# EAGLE board arduino_uno_pcb _with_lcd (EAGLE 6.1)
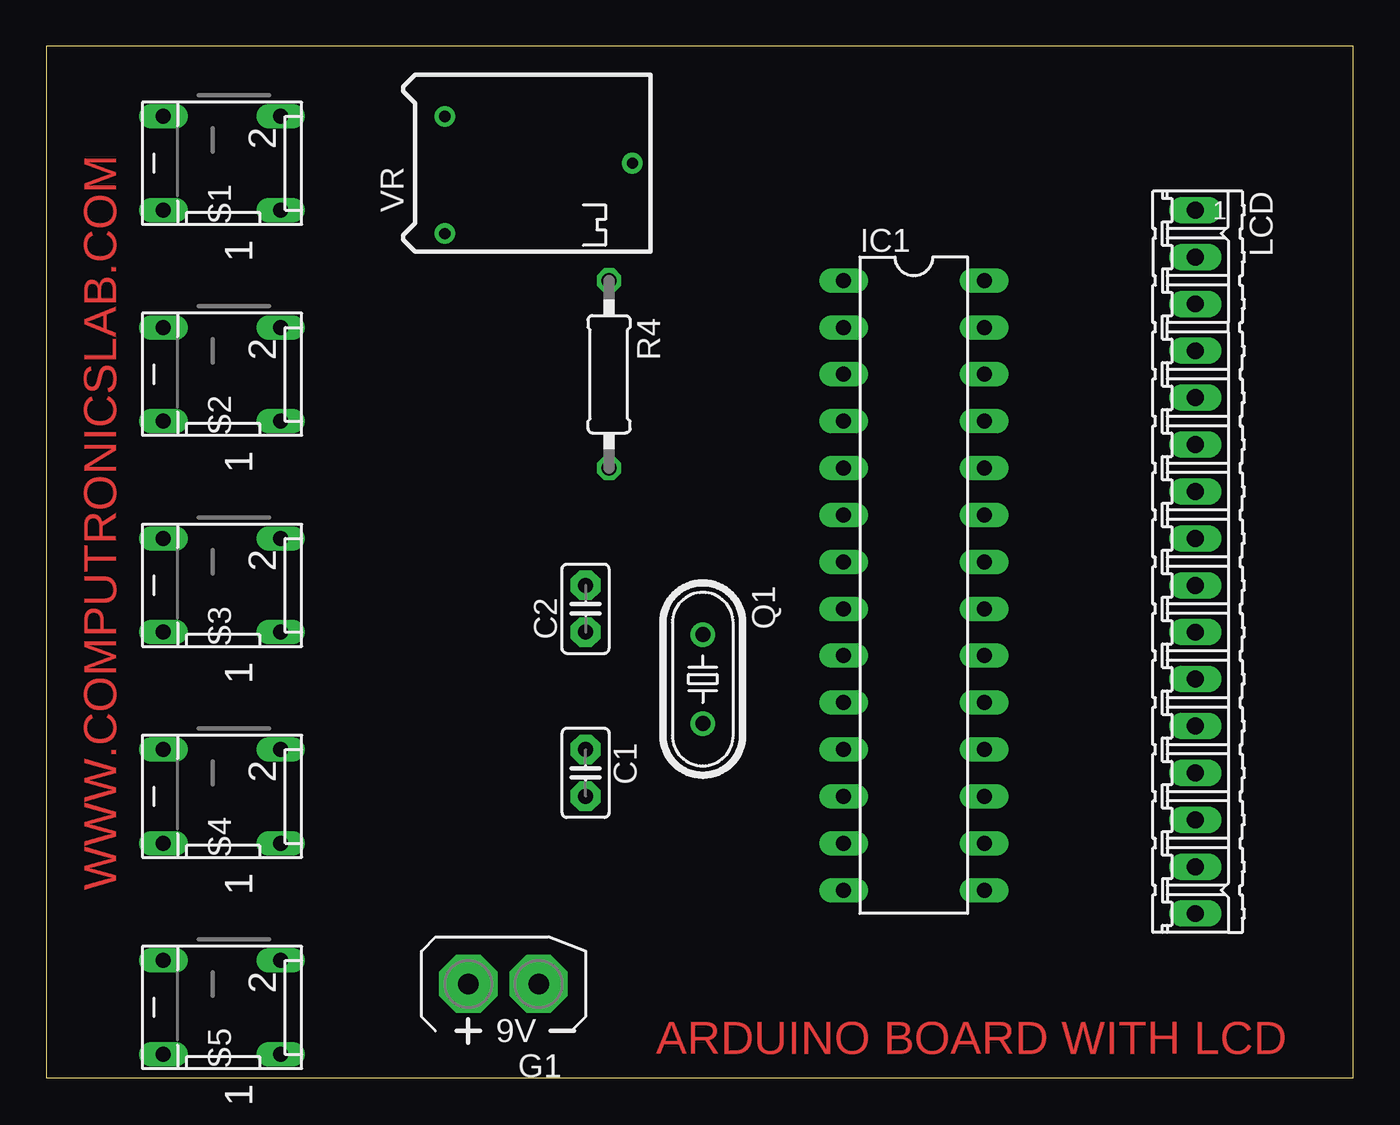
[diagram p0: board, top side]
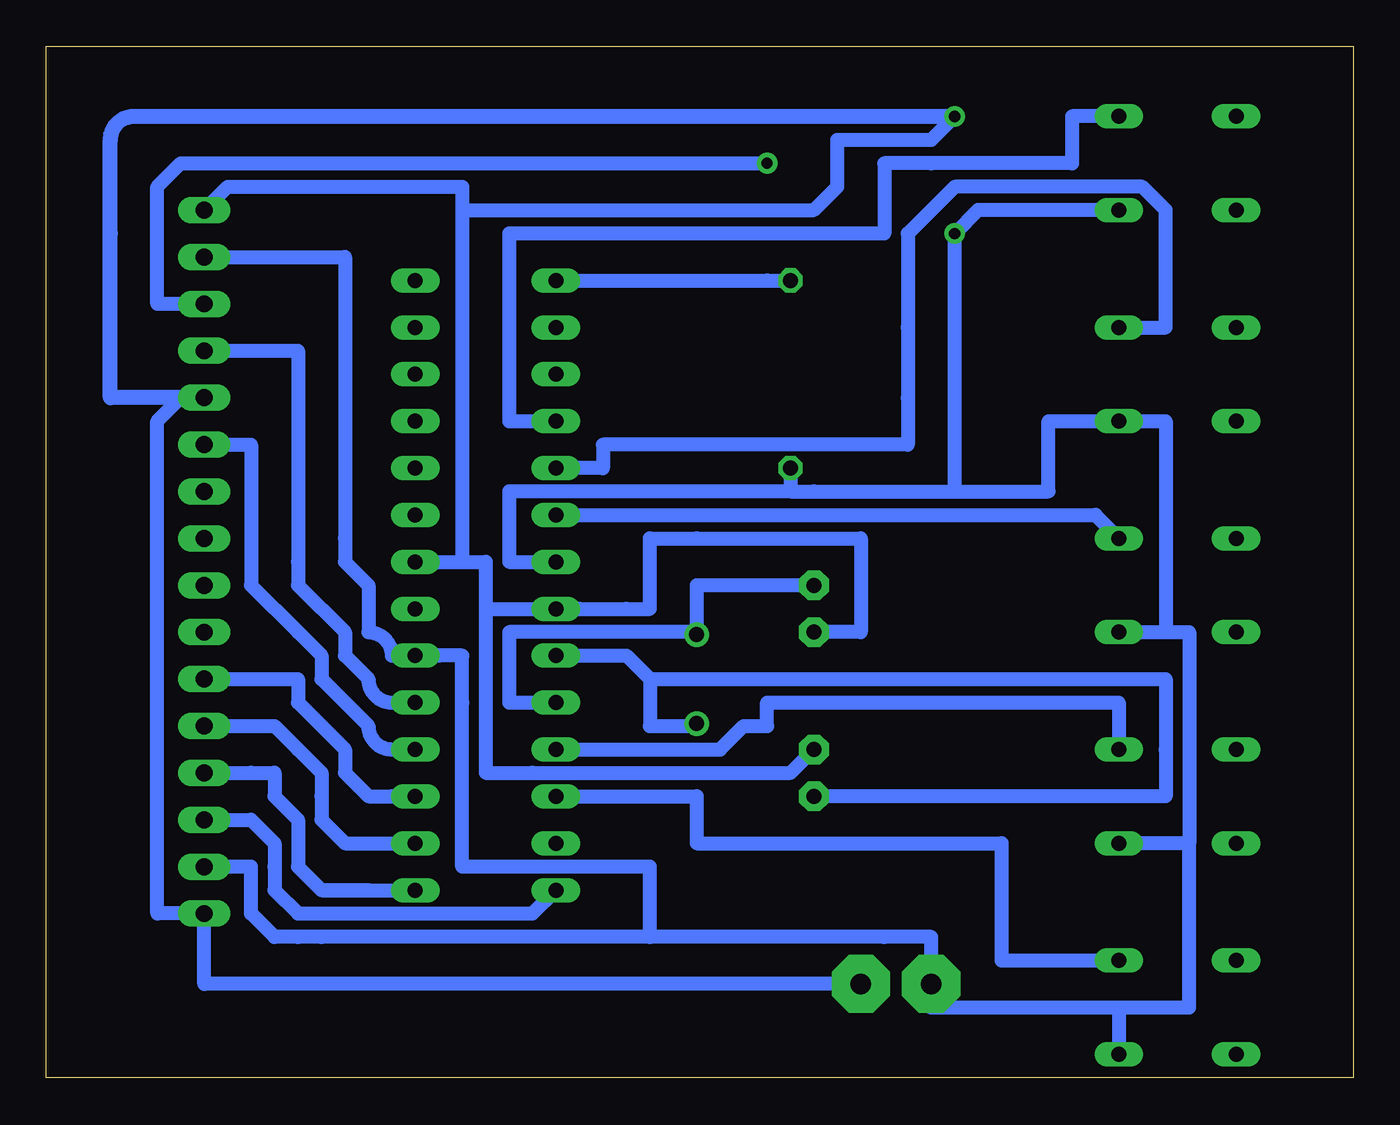
[diagram p1: board, bottom side, seen from below]

Size 70.79 x 55.87 mm. Coordinates in mm from the lower left corner, seen from the top.
Outline: 0,0 70.79,0 70.79,55.87 0,55.87 0,0
Copper layers (1*16): Top 0.04mm / dielectric 1.5mm / Bottom 0.04mm
Design rules: minimum track width 30mil, minimum drill 35mil, track to track 8mil, track to pad 8mil, pad to pad 8mil, via to via 8mil, smd to smd 8mil, copper to edge 50mil, drill to drill 8mil, minimum pad ring 10mil, minimum via ring 8mil, stop-mask expansion 4mil, vias tented up to drill 0mil, thermal gap 10mil

## Footprints (pad centres in the part's own frame; a part is rotated, then mirrored left to right if it is on the bottom)
C2.5-2 = drill 0.813 pad 1.6 octagon: 1 -1.27,0; 2 1.27,0
AB9V = drill 1.118 pad 3.15 octagon: + 0,2.54; - 0,-1.27
DIL28-3 = drill 0.813 long: 1 -16.51,-3.81; 2 -13.97,-3.81; 3 -11.43,-3.81; 4 -8.89,-3.81; 5 -6.35,-3.81; 6 -3.81,-3.81; 7 -1.27,-3.81; 8 1.27,-3.81; 9 3.81,-3.81; 10 6.35,-3.81; 11 8.89,-3.81; 12 11.43,-3.81; 13 13.97,-3.81; 14 16.51,-3.81; 15 16.51,3.81; 16 13.97,3.81; 17 11.43,3.81; 18 8.89,3.81; 19 6.35,3.81; 20 3.81,3.81; 21 1.27,3.81; 22 -1.27,3.81; 23 -3.81,3.81; 24 -6.35,3.81; 25 -8.89,3.81; 26 -11.43,3.81; 27 -13.97,3.81; 28 -16.51,3.81
16P = drill 0.914 long: 1 -19.05,0; 2 -16.51,0; 3 -13.97,0; 4 -11.43,0; 5 -8.89,0; 6 -6.35,0; 7 -3.81,0; 8 -1.27,0; 9 1.27,0; 10 3.81,0; 11 6.35,0; 12 8.89,0; 13 11.43,0; 14 13.97,0; 15 16.51,0; 16 19.05,0
HC49/S = drill 0.813: 1 -2.413,0; 2 2.413,0
0207/10 = drill 0.813 octagon: 1 -5.08,0; 2 5.08,0
DP-02 = drill 0.813 long: 1 -2.54,-2.54; 2 2.54,-2.54; 3 2.54,3.81; 4 -2.54,3.81
RTRIM64P = drill 0.61: 1 -2.54,-3.81; 2 7.62,0; 3 -2.54,2.54

## Placement (x,y rotation side)
C1  22pf  [C2.5-2]  29.21,16.51 270 top
C2  22pf  [C2.5-2]  29.21,25.4 90 top
G1  AB9V  [AB9V]  25.4,5.08 90 top
IC1  ATMEGA328  [DIL28-3]  46.99,26.67 270 top
LCD  [16P]  62.23,27.94 270 top
Q1  16MHZ  [HC49/S]  35.56,21.59 270 top
R4  10K  [0207/10]  30.48,38.1 270 top
S1  [DP-02]  10.16,49.53 90 top
S2  [DP-02]  10.16,38.1 90 top
S3  [DP-02]  10.16,26.67 90 top
S4  [DP-02]  10.16,15.24 90 top
S5  [DP-02]  10.16,3.81 90 top
VR  100k  [RTRIM64P]  24.13,49.53 0 top

## Library data of the parts
C1 C2 = capacitor-wima
G1 = battery
IC1 = quantum-research-group; OC_FARNELL: unknown; OC_NEWARK: unknown
LCD = con-amp-quick; OC_FARNELL: unknown; OC_NEWARK: unknown
Q1 = crystal; OC_FARNELL: 1667008; OC_NEWARK: unknown
R4 = rcl
S1-S5 = switch-dil; MPN: MCDP02; OC_FARNELL: 1255233; OC_NEWARK: 26M1095
VR = resistor

## Nets
N$1: C1.2 IC1.9 Q1.2
N$2: C2.2 IC1.10 Q1.1
N$3: G1.+ IC1.7 IC1.20 LCD.2 LCD.15 R4.2 S1.1 S2.1 S3.1 S4.1 S5.1 VR.1
N$4: IC1.11 S4.2
N$5: IC1.4 S1.2
N$7: IC1.5 S2.2
N$8: IC1.6 S3.2
N$9: IC1.12 S5.2
N$22: LCD.3 VR.2
N$23: IC1.19 LCD.4
N$24: IC1.18 LCD.6
N$25: IC1.17 LCD.11
N$26: IC1.16 LCD.12
N$27: IC1.15 LCD.13
N$28: C1.1 C2.1 G1.- IC1.8 IC1.22 LCD.1 LCD.5 LCD.16 VR.3
N$29: IC1.14 LCD.14
N$31: IC1.1 R4.1

## Tracks (layer width: path | path; a pad name or v marks a point on that pad's centre or on a via)
N$1
  Bottom 0.762: 38.1,21.59 39.37,22.86 IC1.9 | 38.1,21.59 38.1,19.05 35.56,19.05 Q1.2 | C1.2 27.94,15.24 10.16,15.24 10.16,17.78 10.16,21.59 38.1,21.59
N$2
  Bottom 0.762: 35.56,24.13 35.56,26.67 C2.2 | 35.56,24.13 Q1.1 35.56,24.13 | IC1.10 45.72,20.32 45.72,22.86 45.72,24.13 35.56,24.13
N$3
  Bottom 0.762: 8.89,12.7 S4.1 8.89,12.7 | 8.89,12.7 8.89,24.13 10.16,24.13 | S3.1 10.16,24.13 | S1.1 20.32,46.99 VR.1 21.59,31.75 | 30.48,31.75 R4.2 30.48,31.75 | 30.48,31.75 29.21,31.75 21.59,31.75 | 21.59,31.75 16.51,31.75 16.51,35.56 S2.1 10.16,35.56 10.16,24.13 | IC1.7 45.72,27.94 45.72,30.48 45.72,31.75 40.64,31.75 30.48,31.75 | LCD.2 54.61,44.45 54.61,29.21 54.61,27.94 53.34,26.67 53.34,24.13 arc90 52.07,22.86 IC1.20 49.53,22.86 48.26,22.86 48.26,20.32 48.26,11.43 41.91,11.43 38.1,11.43 38.1,7.62 | 12.7,3.81 S5.1 | 12.7,3.81 22.86,3.81 G1.+ 22.86,7.62 25.4,7.62 38.1,7.62 | LCD.15 59.69,11.43 59.69,10.16 59.69,8.89 58.42,7.62 57.15,7.62 55.88,7.62 38.1,7.62 | 8.89,12.7 8.89,5.08 8.89,3.81 12.7,3.81
N$4
  Bottom 0.762: S4.2 12.7,20.32 31.75,20.32 31.75,19.05 33.02,19.05 34.29,17.78 IC1.11
N$5
  Bottom 0.762: IC1.4 45.72,35.56 45.72,45.72 25.4,45.72 25.4,49.53 22.86,49.53 15.24,49.53 15.24,52.07 S1.2
N$7
  Bottom 0.762: IC1.5 40.64,33.02 40.64,34.29 24.13,34.29 24.13,36.83 24.13,40.64 24.13,45.72 21.59,48.26 11.43,48.26 10.16,46.99 10.16,40.64 S2.2
N$8
  Bottom 0.762: S3.2 13.97,30.48 IC1.6
N$9
  Bottom 0.762: S5.2 17.78,6.35 19.05,6.35 19.05,7.62 19.05,12.7 35.56,12.7 35.56,15.24 IC1.12
N$22
  Bottom 0.762: VR.2 63.5,49.53 64.77,48.26 64.77,41.91 LCD.3
N$23
  Bottom 0.762: IC1.19 52.07,20.32 arc90 53.34,21.59 54.61,22.86 54.61,24.13 57.15,26.67 57.15,27.94 57.15,39.37 LCD.4
N$24
  Bottom 0.762: IC1.18 52.07,17.78 arc90 53.34,19.05 55.88,21.59 55.88,22.86 57.15,24.13 59.69,26.67 59.69,34.29 LCD.6
N$25
  Bottom 0.762: IC1.17 52.07,15.24 53.34,15.24 54.61,16.51 54.61,17.78 57.15,20.32 57.15,21.59 LCD.11
N$26
  Bottom 0.762: IC1.16 54.61,12.7 55.88,13.97 55.88,15.24 55.88,16.51 57.15,17.78 58.42,19.05 59.69,19.05 LCD.12
N$27
  Bottom 0.762: 55.88,10.16 53.34,10.16 | 53.34,10.16 IC1.15 | 55.88,10.16 57.15,11.43 57.15,13.97 58.42,15.24 58.42,16.51 59.69,16.51 LCD.13 | 55.88,10.16 53.34,10.16 | 53.34,10.16 55.88,10.16
N$28
  Bottom 0.762: G1.- 62.23,5.08 LCD.16 64.77,8.89 64.77,35.56 63.5,36.83 LCD.5 | 46.99,25.4 IC1.8 41.91,25.4 39.37,25.4 38.1,25.4 38.1,29.21 35.56,29.21 26.67,29.21 26.67,24.13 C2.1 | IC1.22 48.26,27.94 | 48.26,27.94 46.99,27.94 | 46.99,27.94 46.99,25.4 | C1.1 30.48,16.51 44.45,16.51 46.99,16.51 46.99,19.05 46.99,25.4 | 46.99,27.94 46.99,25.4 | VR.3 22.86,50.8 27.94,50.8 27.94,48.26 29.21,46.99 48.26,46.99 48.26,48.26 | 48.26,48.26 60.96,48.26 LCD.1 | 48.26,48.26 48.26,27.94
  Bottom 0.813: LCD.5 67.31,36.83 67.31,45.72 67.31,50.8 arc90 66.04,52.07 62.23,52.07 VR.3
N$29
  Bottom 0.762: IC1.14 44.45,8.89 54.61,8.89 55.88,8.89 57.15,8.89 58.42,10.16 58.42,11.43 58.42,12.7 59.69,13.97 LCD.14
N$31
  Bottom 0.762: R4.1 31.75,43.18 IC1.1

## Text on the board
Top: WWW.COMPUTRONICSLAB.COM | ARDUINO BOARD WITH LCD